# Altium PCB External_Board_2 mode.PcbDoc
Units mm, origin at the board's own origin, x right, y up, seen from the top; angles counter-clockwise.
Board outline 60.32 x 35.26 mm, 2 copper layers (Top Layer, Bottom Layer); 17 components, 9 nets, 83 pads, 2 vias.
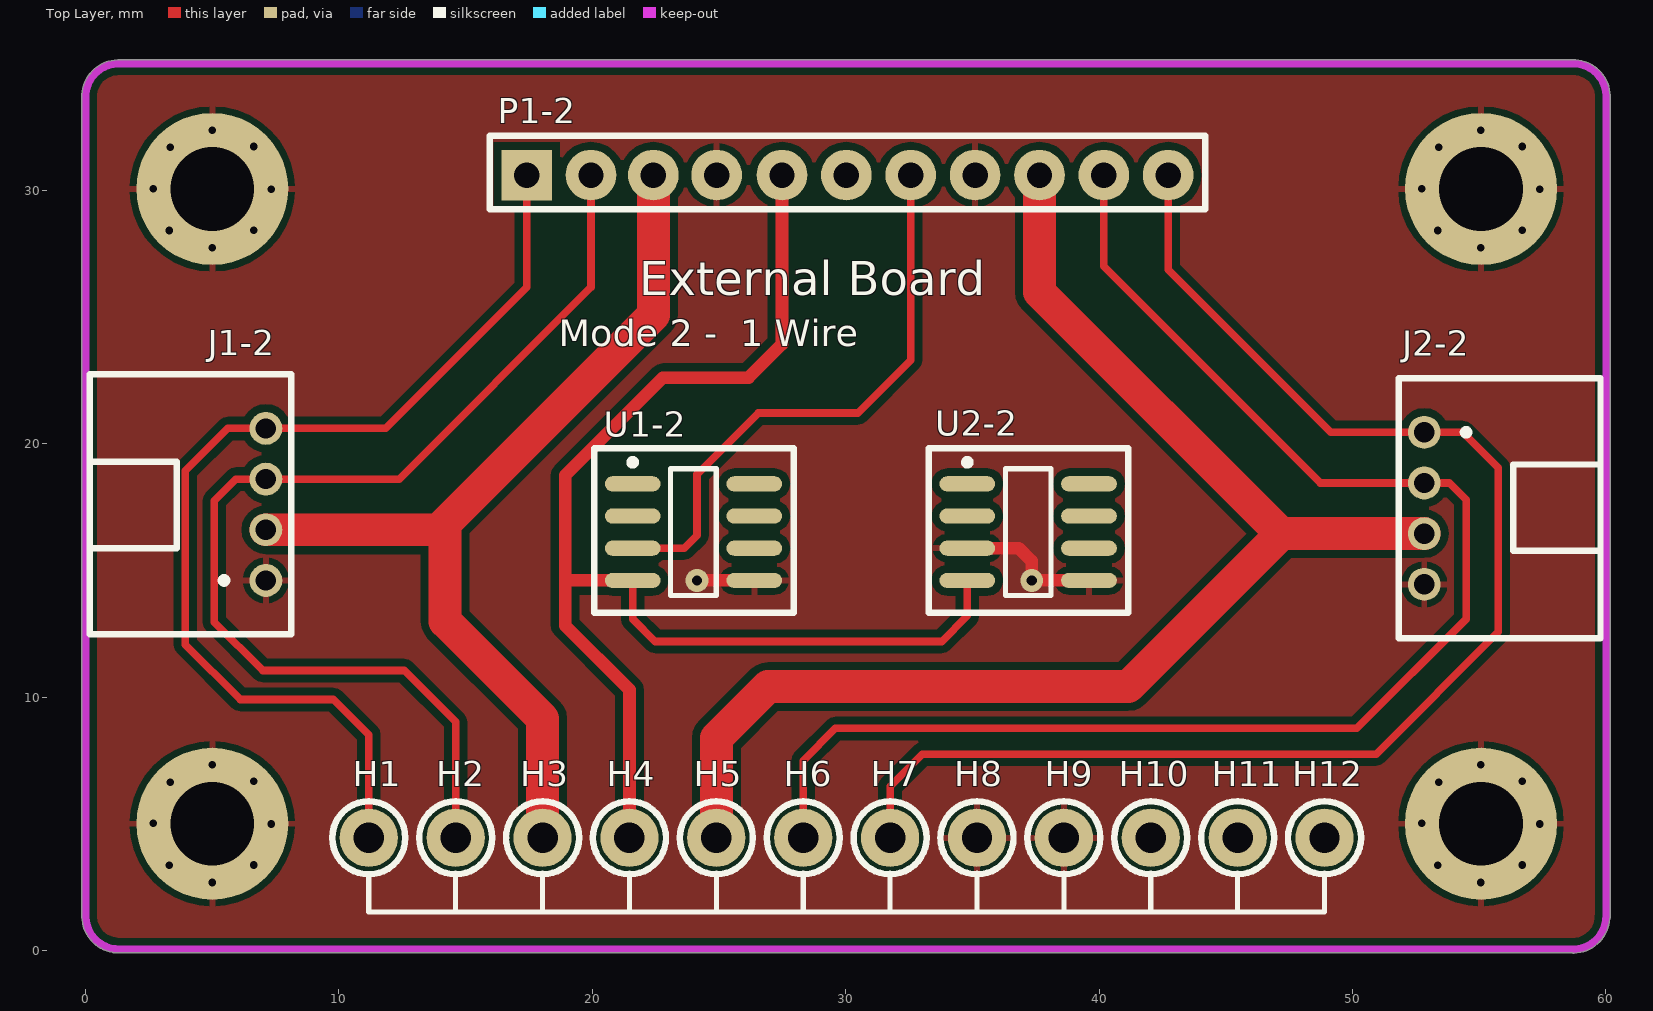
[diagram p0: Top Layer view]
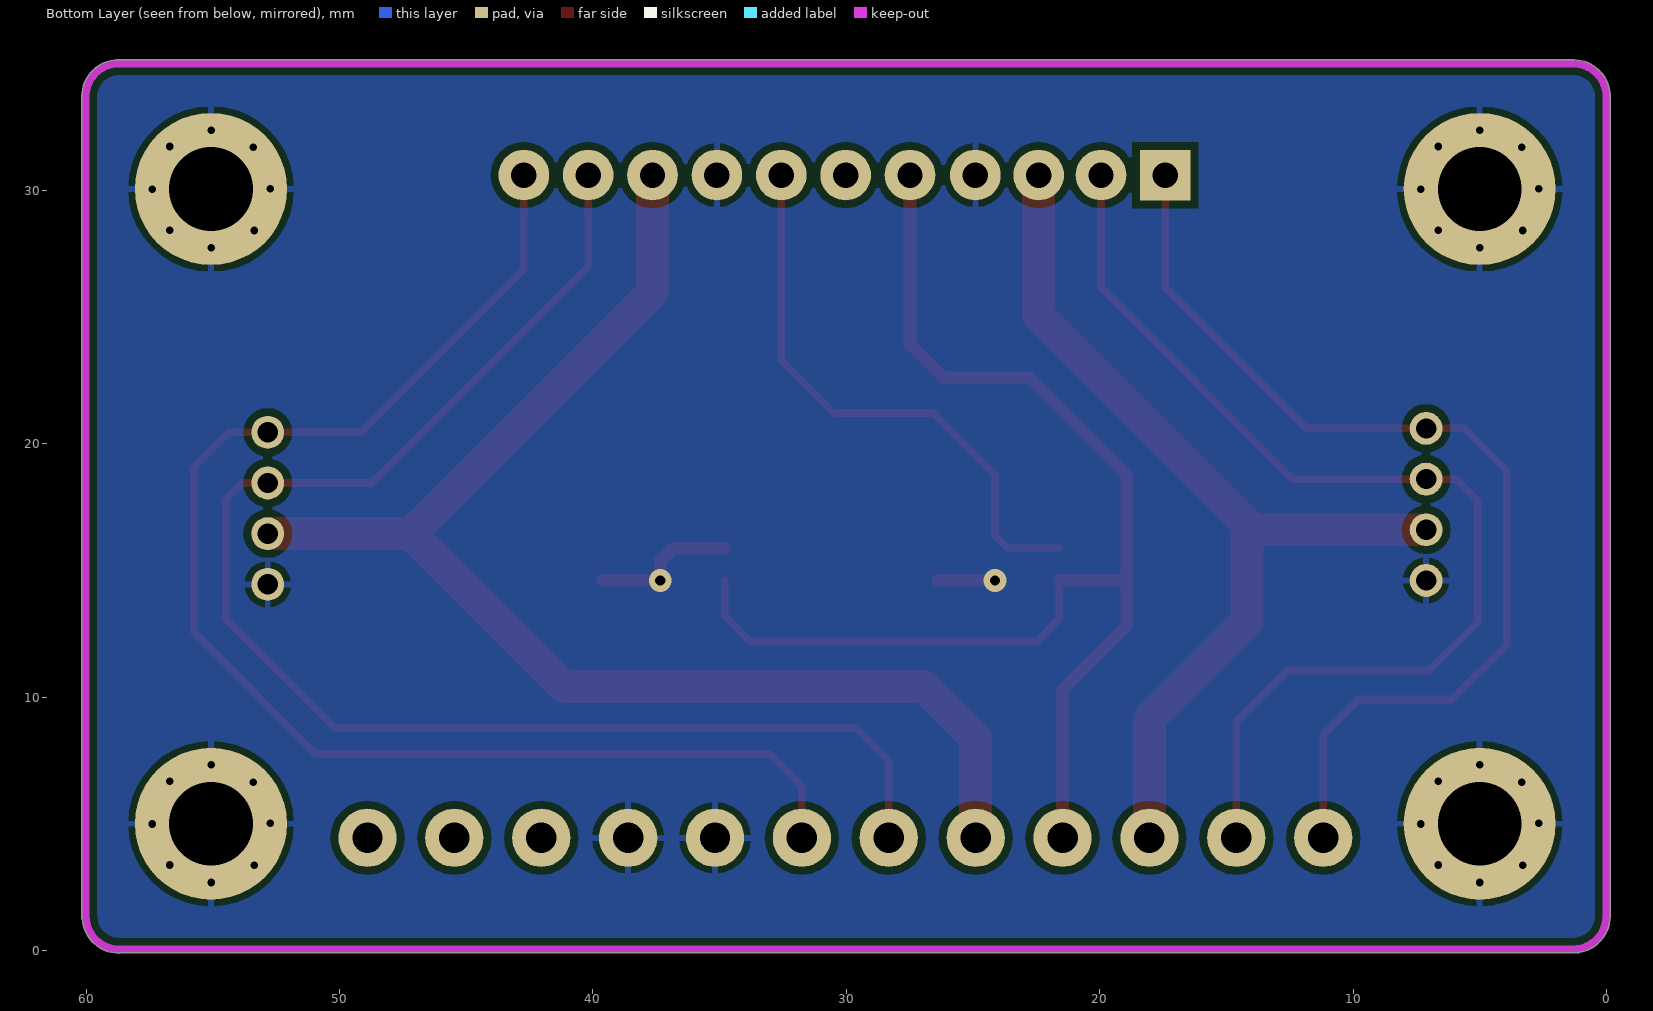
[diagram p1: Bottom Layer view, seen from below]
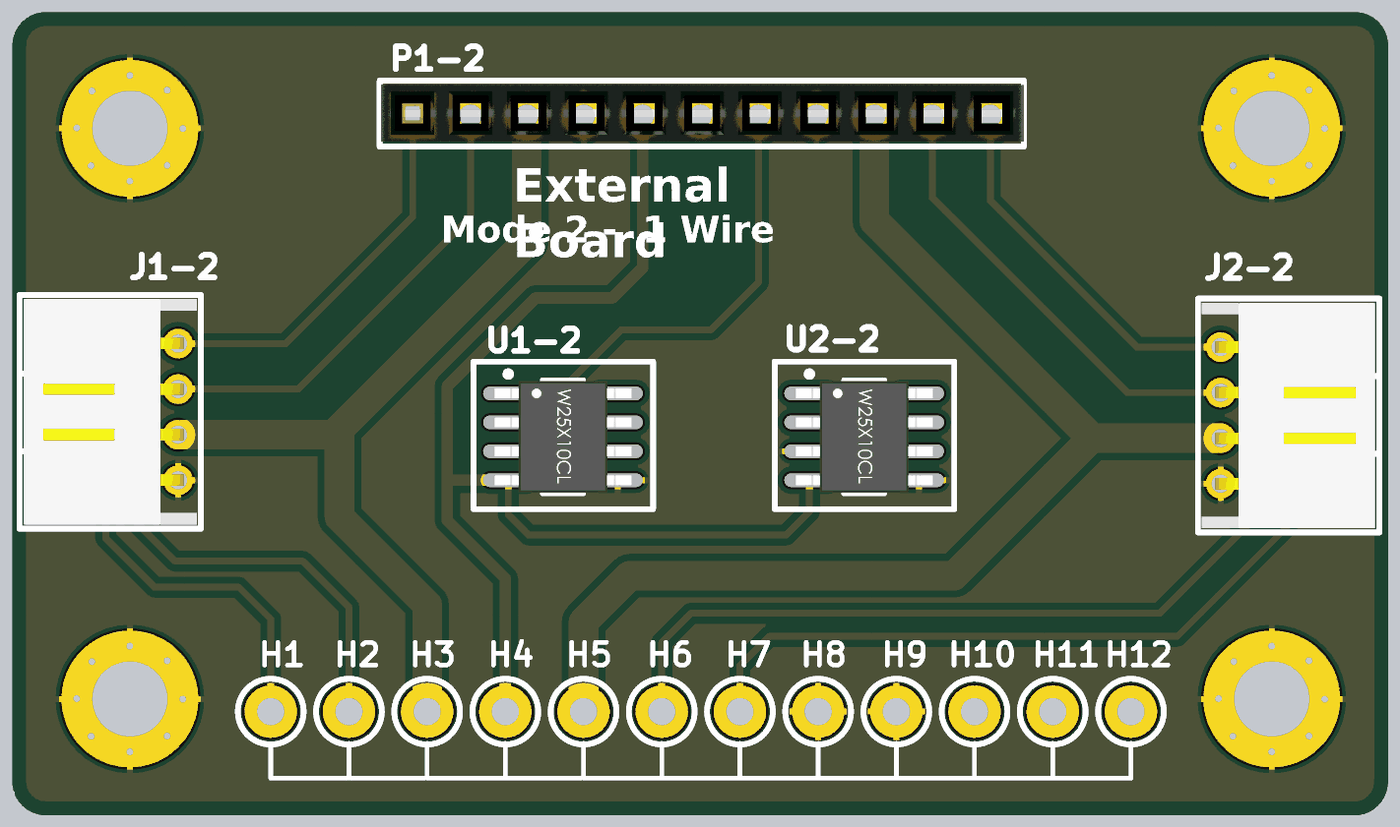
[diagram p2: 3D render of the assembled board from above, using the file's embedded part models]

## Layer stack, top to bottom
Top Solder: solder mask 0.0102, Solder Resist, Dk 3.5
Top Layer: signal copper 0.0356
Dielectric 1: dielectric 0.32, FR-4, Dk 4.8
Bottom Layer: signal copper 0.0356
Bottom Solder: solder mask 0.0102, Solder Resist, Dk 3.5

## Board outline
1.07,-0.079 ccw(c1.143,0.052) 1.143,-0.098 1.268,-0.098 ccw(c1.308,1.36) 1.347,-0.098 58.688,-0.098 ccw(c58.738,0.044) 58.742,-0.107 ccw(c58.7,1.351) 60.155,1.256 ccw(c60.019,1.319) 60.169,1.319 60.169,33.73 ccw(c60.019,33.73) 60.169,33.734 ccw(c58.711,33.693) 58.672,35.15 1.27,35.15 ccw(c1.27,35) 1.266,35.15 ccw(c1.308,33.692) -0.15,33.653 -0.15,1.322 ccw(c0,1.322) -0.15,1.318 ccw(c1.308,1.36)

## Design rules (kind name [scope] priority, off if disabled: settings)
Clearance Clearance_1 [inpoly] p1: gap=0.3
Clearance [All] p2: gap=0.203
HoleSize [All] p1: absolutevalues=TRUE maxlimit=8 minlimit=0.2 maxpercent=80.000 minpercent=20.000
HoleToHoleClearance [All] p1: gap=0.1 allowstackedmicrovias=TRUE
MinimumSolderMaskSliver [All] p1: minsoldermaskwidth=0.01
PlaneConnect [All] p1: planeconnectstyle=Relief reliefexpansion=0.254 reliefentries=4 reliefconductorwidth=0.254 reliefairgap=0.254
PolygonConnect PolygonConnect_1 [IsVia] p1: connectstyle=Direct reliefconductorwidth=0.254 reliefentries=4 polygonreliefangle="90 Angle" airgapwidth=0.254
PolygonConnect [All] p2: connectstyle=Relief reliefconductorwidth=0.254 reliefentries=4 polygonreliefangle="90 Angle" airgapwidth=0.254
RoutingVias [All] p1: holewidth=0.305 width=0.61 viastyle="Through Hole" minholewidth=0.305 minwidth=0.61 maxholewidth=0.711 maxwidth=1.27
SilkToSilkClearance [All] p1: silktosilkclearance=0.01
SilkToSolderMaskClearance [IsPad] p1: minsilkscreentomaskgap=0 clearancetoexposedcopper=TRUE
SolderMaskExpansion isvia [ISVIA] p1: expansion=0 soldermaskfromhole=TRUE
SolderMaskExpansion [All] p2: expansion=0.102
Width [All] p1: maxlimit=3 minlimit=0.3 preferedwidth=0.3
24 further rules are at their usual default settings.

## Components (designator, comment, footprint, x,y, rotation, side; value= is the part's Value field where it differs from the comment)
H1 "TP_HOLE" TestHole 11.176,4.445 r0 top
H2 "TP_HOLE" TestHole 14.605,4.445 r0 top
H3 "TP_HOLE" TestHole 18.034,4.445 r0 top
H4 "TP_HOLE" TestHole 21.463,4.445 r0 top
H5 "TP_HOLE" TestHole 24.892,4.445 r0 top
H6 "TP_HOLE" TestHole 28.321,4.445 r0 top
H7 "TP_HOLE" TestHole 31.75,4.445 r0 top
H8 "TP_HOLE" TestHole 35.179,4.445 r0 top
H9 "TP_HOLE" TestHole 38.608,4.445 r0 top
H10 "TP_HOLE" TestHole 42.037,4.445 r0 top
H11 "TP_HOLE" TestHole 45.466,4.445 r0 top
H12 "TP_HOLE" TestHole 48.895,4.445 r0 top
J1-2 "S4B-PH-K-S" CON4 7.112,14.605 r90 top (schematic designator J1-1)
J2-2 "S4B-PH-K-S" CON4 52.832,20.447 r270 top locked (schematic designator J2-1)
P1-2 "Header11" CON11 17.399,30.607 r0 top locked (schematic designator P1-1)
U1-2 "DS1822Z" DS1822 21.59,18.415 r0 top locked
U2-2 "DS1822Z" DS1822 34.798,18.415 r0 top

## Footprints (in the part's own frame and the unit in brackets; to place one, negate y for a bottom-side part, rotate by r counter-clockwise, add the part's x,y. Pads: shape width x height; smd on the part's side, far side on the other; paste and mask are expansions set on the pad)
CON4 [mm] "CONN HEADER PH SIDE 4POS 2MM"
  round 1.3 hole 0.8: 1(-0.002,-0.002) 2(1.998,-0.002) 3(3.998,-0.002) 4(5.998,-0.002)
  silkscreen extent -2.13,-1 8.13,6.95, body extent -1.95,-0.83 7.95,6.77, height 4.8
CON11 [mm] "CONN HEADR FMALE 11POS .1\" DL AU"
  rect 2x2 hole 1: 1(0.005,-0.007)
  round 2 hole 1: 2(2.545,-0.007) 3(5.005,-0.007) 4(7.505,-0.007) 5(10.085,-0.007) 6(12.625,-0.007) 7(15.165,-0.007) 8(17.705,-0.007) 9(20.245,-0.007) 10(22.785,-0.007) 11(25.325,-0.007)
  silkscreen extent -1.44,-1.36 26.8,1.54, body extent -1.4,-1.14 26.8,1.36, height 8.5
DS1822 [mm] "SENSOR TEMPERATURE 1-WIRE 8SOIC"
  oval 2.2x0.6 smd: 1(0,0) 2(0,-1.27) 3(0,-2.54) 4(0,-3.81) 5(4.8,-3.81) 6(4.8,-2.54) 7(4.8,-1.27) 8(4.8,0)
  silkscreen extent -0.12,-4.41 3.3,0.97, body extent -0.6,-4.36 5.4,0.54, height 1.55
TestHole [mm] "pad of test through hole"
  round 2.3 hole 1.2: 1(0,0)
  silkscreen extent -1.44,-1.44 1.44,1.44

## Part data
H1 H2 H3 H4 H5 H6 H7 H8 H9 H10 H11 H12: "TEST POINT HOLE"
J1-2 J2-2: library part "S4B-PH-K-S (LF)(SN)", "JST (JAPAN SOLDERLESS TERMINALS) - S4B-PH-K-S (LF)(SN) - CONNECTOR, HEADER, 2MM, 4 POSITION, 1ROW"
P1-2: library part SFH11-PBPC-D10-ST-BK, "CONN HEADR FMALE 20POS .1\" DL AU"
U1-2 U2-2: library part DS1822Z+, "SENSOR TEMPERATURE 1-WIRE 8SOIC"

## Free pads (board coordinates)
  round 0.6 hole 0.3: 1(2.664,5.017) 1(2.664,30.069) 1(3.296,3.361) 1(3.296,28.413) 1(3.334,6.64) 1(3.334,31.692) 1(4.996,7.323) 1(4.996,32.375) 1(4.997,2.68) 1(4.997,27.732) 1(6.633,6.679) 1(6.633,31.731) 1(6.633,3.374) 1(6.633,28.426) 1(7.321,4.991) 1(7.321,30.043) 1(52.735,5.017) 1(52.735,30.069) 1(53.367,3.361) 1(53.367,28.413) 1(53.405,6.64) 1(53.405,31.692) 1(55.067,7.323) 1(55.067,32.375) 1(55.068,2.68) 1(55.068,27.732) 1(56.704,6.679) 1(56.704,31.731) 1(56.704,3.374) 1(56.704,28.426) 1(57.392,4.991) 1(57.392,30.043)
  round 6 hole 3.3: 1(5,5) 1(5,30.052) 1(55.071,5) 1(55.071,30.052)

## Via types
v1: diameter 0.9, hole 0.4, Top Layer to Bottom Layer, 2 vias

## Nets (pads, with @x,y where several pads share a name; then routed paths per layer and width w, separated by ;. In a path a pad name is that pad's centre, name@x,y a point inside that pad or via, vN(x,y) a via of type N, cw(c..) or ccw(c..) an arc to the next point about the centre after c; other vN are vias at no path point)
GND: H8.1 H9.1 J1-2.1 J2-2.4 P1-2.4 P1-2.8 pad.1 U1-2.5 U2-2.3 U2-2.5 | length 8
  Top Layer w0.5: v1(24.13,14.605) U1-2.5 ; U2-2.3 36.83,15.875 37.338,15.367 v1(37.338,14.605) U2-2.5
NetH4_1: H4.1 P1-2.5 U1-2.4 U2-2.4 | length 52.3
  Top Layer w0.3: U1-2.4 21.59,13.081 22.479,12.192 33.782,12.192 34.798,13.208 U2-2.4
  Top Layer w0.5: H4.1 21.463,10.287 18.923,12.827 18.923,14.605 ; U1-2.4 18.923,14.605 ; P1-2.5 27.484,23.928 26.162,22.606 22.784,22.606 18.923,18.745 18.923,14.605
NetP1-2_7: P1-2.7 U1-2.3 | length 22.8
  Top Layer w0.3: U1-2.3 23.622,15.875 24.13,16.383 24.13,18.796 26.543,21.209 30.48,21.209 32.564,23.293 P1-2.7
SCL: H1.1 J1-2.4 P1-2.1 | length 40.5
  Top Layer w0.3: H1.1 11.176,8.509 9.779,9.906 6.096,9.906 3.937,12.065 3.937,18.923 5.617,20.603 J1-2.4 11.84,20.603 17.404,26.167 P1-2.1
SCL_2: H7.1 J2-2.1 P1-2.11 | length 55
  Top Layer w0.3: H7.1 31.75,6.477 33.02,7.747 50.927,7.747 55.753,12.573 55.753,19.05 54.354,20.449 J2-2.1 49.147,20.449 42.724,26.872 P1-2.11
SDA: H2.1 J1-2.3 P1-2.2 | length 43.3
  Top Layer w0.3: H2.1 14.605,9.017 12.573,11.049 6.985,11.049 5.08,12.954 5.08,17.754 5.929,18.603 J1-2.3 12.38,18.603 19.944,26.167 P1-2.2
SDA_2: H6.1 J2-2.2 P1-2.10 | length 57.9
  Top Layer w0.3: H6.1 28.321,7.493 29.591,8.763 50.165,8.763 54.483,13.081 54.483,17.78 53.814,18.449 J2-2.2 48.734,18.449 40.184,26.999 P1-2.10
VCC: H3.1 J1-2.2 P1-2.3 | length 38.2
  Top Layer w1.3: J1-2.2 14.19,16.603 ; H3.1 18.034,9.144 14.19,12.988 14.19,16.857 22.404,25.071 P1-2.3
VCC_2: H5.1 J2-2.3 P1-2.9 | length 53.4
  Top Layer w1.3: H5.1@24.892,4.318 24.892,8.382 26.924,10.414 41.148,10.414 47.182,16.448 37.644,25.986 P1-2.9 ; 47.18,16.449 J2-2.3
pads on no net: H10.1 H11.1 H12.1 P1-2.6 U1-2.1 U1-2.2 U1-2.6 U1-2.7 U1-2.8 U2-2.1 U2-2.2 U2-2.6 U2-2.7 U2-2.8

## Polygon pours and split planes (outlines as drawn)
GND on Top Layer "Top_Layer" (solid, remove dead copper, pour order 22): -0.254,35.179 60.198,35.179 60.198,-0.127 -0.254,-0.127 -0.254,35.179
GND on Bottom Layer "Bottom_Layer" (solid, remove dead copper, pour order 24): -0.254,35.179 60.198,35.179 60.198,-0.127 -0.254,-0.127 -0.254,35.179

## Keep-outs
Keep-Out Layer:
  lines w0.3: 1.143,0.052 58.8,0.052 ; 1.345,0.052 cw(c1.308,1.36) 0,1.322 0,33.655 cw(c1.308,33.692) 1.27,35 58.674,35 cw(c58.711,33.693) 60.019,33.73 60.019,1.319 ; 58.738,0.044 ccw(c58.7,1.351) 60.008,1.389

## Silkscreen, mask and mechanical layers (free items; w line width, h text height)
Top Overlay:
  lines w0.203: 11.176,2.921 11.176,1.524 48.895,1.524 48.895,3.048 ; 14.605,1.524 14.605,3.048 ; 18.034,1.524 18.034,3.048 ; 21.463,1.524 21.463,3.048 ; 24.892,1.524 24.892,3.048 ; 28.321,1.524 28.321,3.048 ; 31.75,1.524 31.75,3.048 ; 35.179,1.524 35.179,3.048 ; 38.608,1.524 38.608,3.048 ; 42.037,1.524 42.037,3.048 ; 45.466,1.524 45.466,3.048
  lines w0.254: 20.066,13.335 20.066,19.812 27.94,19.812 27.94,13.335 20.066,13.335 ; 33.274,13.335 41.148,13.335 41.148,19.812 33.274,19.812 33.274,13.335
  text "External Board" at 21.844,25.4 h2.3
  text "Mode 2 -  1 Wire" at 18.669,23.495 h1.8